# Altium PCB SimpleNode37.PcbDoc
Units mil, origin at the board's own origin, x right, y up, seen from the top; angles counter-clockwise.
Board outline 1299.21 x 551.59 mil, 2 copper layers (Top Layer, Bottom Layer); 43 components, 43 nets, 179 pads, 35 vias.
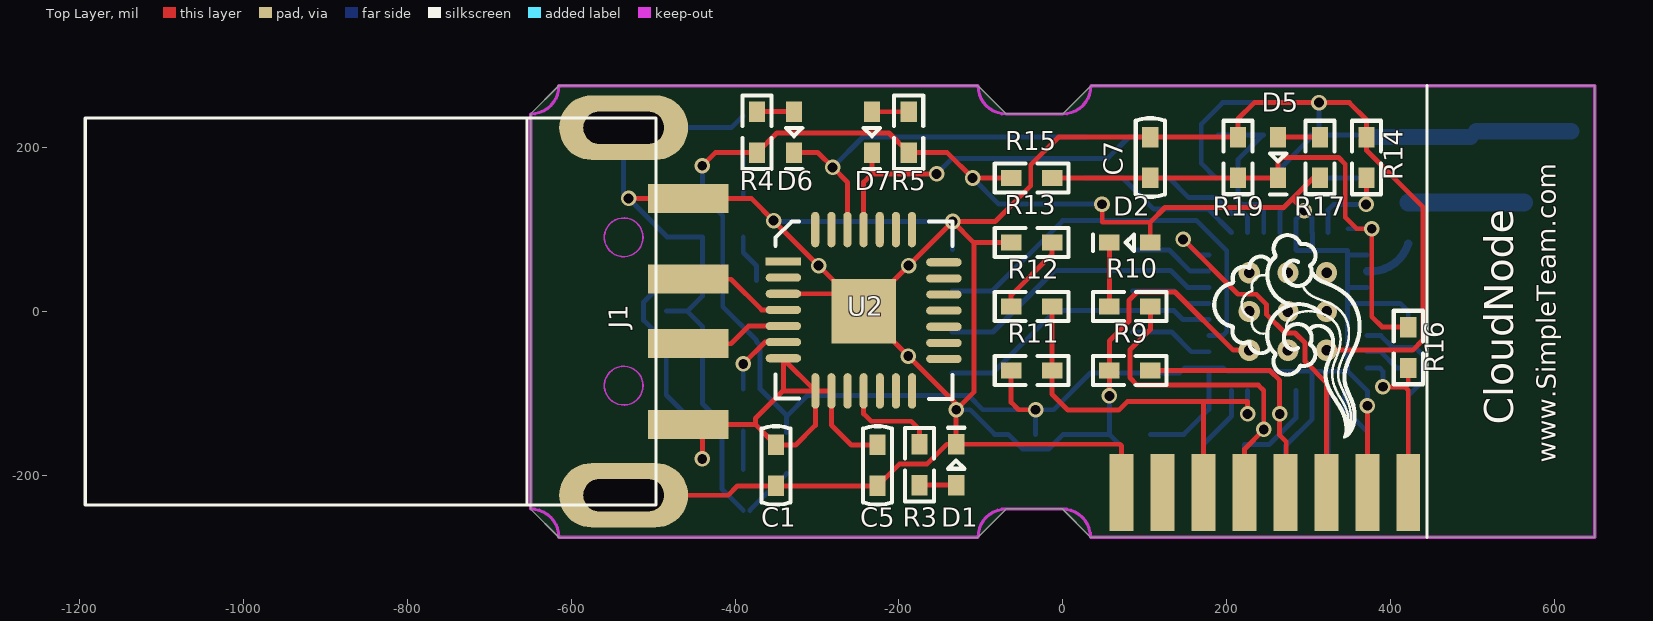
[diagram p0: Top Layer view]
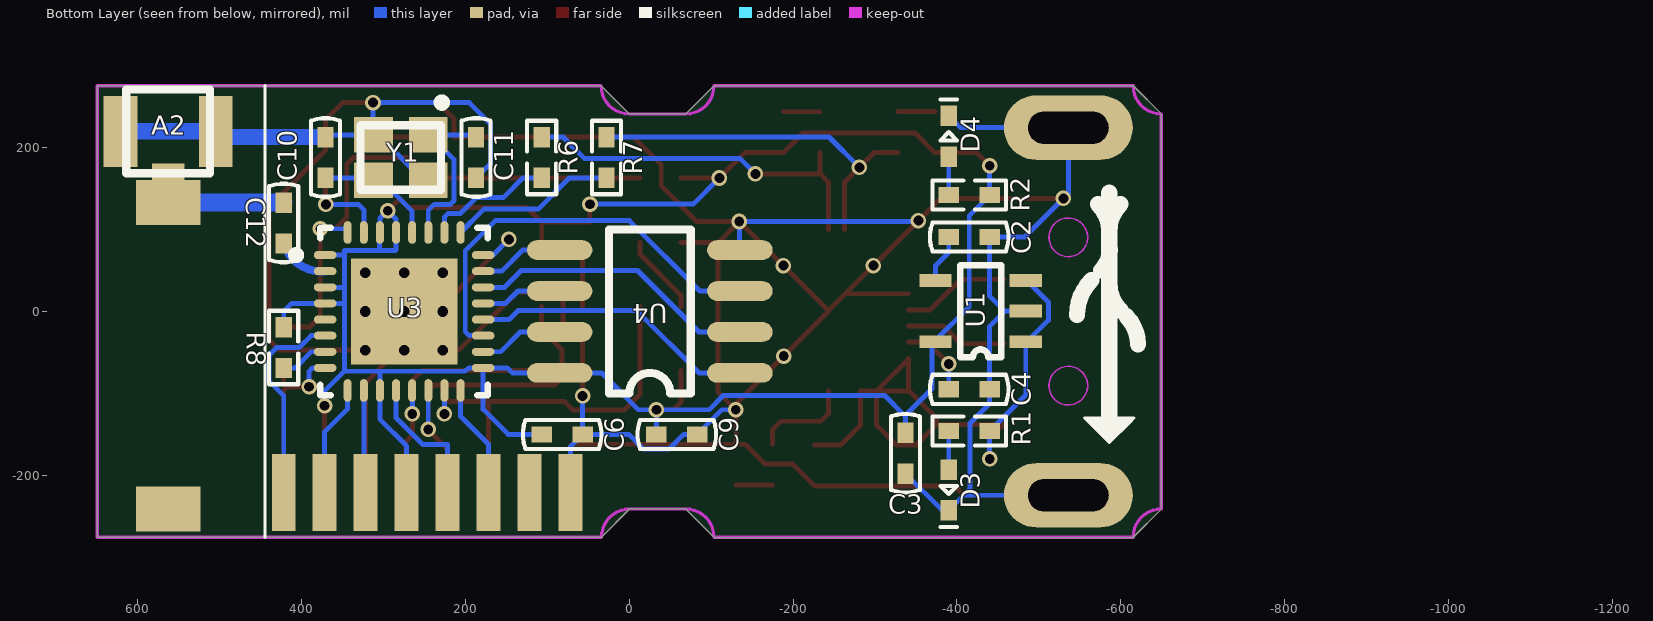
[diagram p1: Bottom Layer view, seen from below]

## Layer stack, top to bottom
Top Layer: signal copper 1.4
Dielectric: dielectric 12.6, FR-4, Dk 4.8
Bottom Layer: signal copper 1.4

## Board outline
649.61,275.59 34.45,275.59 0,241.14 -68.9,241.14 -103.35,275.59 -615.16,275.59 -649.61,241.14 -649.61,-241.14 -615.16,-275.59 -614.75,-276 -106.61,-276 -103.76,-276 -68.9,-241.14 0,-241.14 0,-241.59 34,-275.59 649.61,-275.59

## Design rules (kind name [scope] priority, off if disabled: settings)
Clearance [All] p1: gap=5
DiffPairsRouting [All] p1: maxlimit=10 minlimit=10 mostfreqgap=10 maxuncoupledlength=500
MinimumSolderMaskSliver [All] p1 off: minsoldermaskwidth=5
PolygonConnect [All] p1: connectstyle=Relief reliefconductorwidth=10 reliefentries=4 polygonreliefangle="90 Angle"
RoutingVias [All] p1: holewidth=12 width=19 viastyle="Through Hole" minholewidth=12 minwidth=19 maxholewidth=28 maxwidth=50
SilkToSilkClearance [All] p1 off: silktosilkclearance=5
SilkscreenOverComponentPads [All] p1 off: minsilkscreentomaskgap=5
SolderMaskExpansion [All] p1: expansion=4
Width Width_50ohms [InNet('NetA1_1')] p1: maxlimit=50 minlimit=10 preferedwidth=10 impedancedriven=TRUE minimp=10.000000 maximp=100.000000 favimp=50.000000
Width [All] p2: maxlimit=20 minlimit=6 preferedwidth=6
24 further rules are at their usual default settings.

## Classes and differential pairs
differential pair UD: +UD_P -UD_N

## Components (designator, comment, footprint, x,y, rotation, side; value= is the part's Value field where it differs from the comment)
A2 "50ohm" "IPEX-1 底座" 563,220 r270 bottom
C1 "105" C0402 -350,-188 r90 top
C2 "CAP" C0402 -415,91 r0 bottom
C3 "CAP" C0402 -337,-173 r90 bottom
C4 "10V" C0402 -415,-95 r0 bottom
C5 "10V" C0402 -226,-188 r270 top
C6 "10V" C0402 82,-150.01 r0 bottom
C7 "10V" C0402 107,188 r270 top
C9 "10V" C0402 -58,-150.01 r0 bottom
C10 "10V" C0402 371,188 r90 bottom locked
C11 "10V" C0402 187,188 r270 bottom locked
C12 "10V" C0402 422,108 r270 bottom
D1 "STA" LED0402 -130,-187 r90 top
D2 "STA" LED0402 82.01,84.02 r180 top
D3 "PW5V" LED0402 -390,-218 r270 bottom
D4 "PW3V3" LED0402 -390,214 r90 bottom
D5 "STA" LED0402 263,188 r270 top
D6 "TXD" LED0402 -328,219 r270 top
D7 "RXD" LED0402 -233,219 r270 top
J1 "USB-A" "USB 2.0 Type A 公头 沉板" -536,0 r0 top
R1 "5%" R0402 -415,-146 r0 bottom
R2 "5%" R0402 -415,142 r180 bottom
R3 "5%" R0402 -175,-187 r270 top
R4 "5%" R0402 -373,219 r270 top
R5 "5%" R0402 -188,219 r90 top
R6 "5%" R0402 107,188 r90 bottom
R7 "5%" R0402 28,188 r270 bottom
R8 "5%" R0402 422,-44 r270 bottom
R9 "5%" R0402 82,-72 r0 top
R10 "5%" R0402 82.01,5.98 r0 top
R11 "5%" R0402 -38,-72 r180 top
R12 "5%" R0402 -38,6 r180 top
R13 "FLASH" R0402 -38,84 r0 top
R14 "1%" R0402 371,188 r90 top
R15 "5%" R0402 -38,163 r180 top
R16 "5%" R0402 422,-44 r270 top
R17 "5%" R0402 314,188 r90 top
R19 "RESET" R0402 214,188 r270 top
U1 "SPX3819M5-L-3-3" SOT25-5 -429,3 r0 bottom
U2 "CP2102" MLP28 -243,0 r0 top locked
U3 "ESP8266" QFN32L 275,0 r180 bottom
U4 "2M Flash" SOP8 -25,0 r0 bottom
Y1 "10ppm" XTAL-2520 279,188 r0 bottom locked

## Footprints (in the part's own frame and the unit in brackets; to place one, negate y for a bottom-side part, rotate by r counter-clockwise, add the part's x,y. Pads: shape width x height; smd on the part's side, far side on the other; paste and mask are expansions set on the pad)
C0402 [mm]
  rect 0.635x0.5 smd: 1(-0.635,0) 2(0.635,0)
  silkscreen extent -1.22,-0.45 1.22,0.45
"IPEX-1 底座" [mm]
  rect 1.05x1 smd: 1(1.525,0)
  rect 2.2x1.05 smd: 2(0,1.475) 3(0,-1.475)
  silkscreen extent -1.3,-1.3 1.3,1.3
LED0402 [mm]
  rect 0.635x0.5 smd: 1(-0.632,0) 2(0.633,0)
  silkscreen extent -0.13,-0.25 1.14,0.25
MLP28 [mm]
  rect 1.1x0.25 smd: 1(-2.489,1.549)
  oval 1.1x0.25 smd: 2(-2.489,1.049) 3(-2.489,0.549) 4(-2.489,0.049) 5(-2.489,-0.451) 6(-2.489,-0.951) 7(-2.489,-1.451) 15(2.489,-1.473) 16(2.489,-0.973) 17(2.489,-0.473) 18(2.489,0.027) 19(2.489,0.527) 20(2.489,1.027) 21(2.489,1.527)
  rect 2x2 smd: 3(0,0)
  oval 0.25x1.1 smd: 8(-1.499,-2.464) 9(-0.999,-2.464) 10(-0.499,-2.464) 11(0.001,-2.464) 12(0.501,-2.464) 13(1.001,-2.464) 14(1.501,-2.464) 22(1.499,2.54) 23(0.999,2.54) 24(0.499,2.54) 25(-0.001,2.54) 26(-0.501,2.54) 27(-1.001,2.54) 28(-1.501,2.54)
  silkscreen extent -2.74,-2.71 2.76,2.79
QFN32L [mm]
  oval 0.7x0.25 smd: 1(-2.45,1.75) 2(-2.45,1.25) 3(-2.45,0.75) 4(-2.45,0.25) 5(-2.45,-0.25) 6(-2.45,-0.75) 7(-2.45,-1.25) 8(-2.45,-1.75) 17(2.45,-1.75) 18(2.45,-1.25) 19(2.45,-0.75) 20(2.45,-0.25) 21(2.45,0.25) 22(2.45,0.75) 23(2.45,1.25) 24(2.45,1.75)
  oval 0.25x0.7 smd: 9(-1.75,-2.45) 10(-1.25,-2.45) 11(-0.75,-2.45) 12(-0.25,-2.45) 13(0.25,-2.45) 14(0.75,-2.45) 15(1.25,-2.45) 16(1.75,-2.45) 25(1.75,2.45) 26(1.25,2.45) 27(0.75,2.45) 28(0.25,2.45) 29(-0.25,2.45) 30(-0.75,2.45) 31(-1.25,2.45) 32(-1.75,2.45)
  rect 3.3x3.3 smd: 33(0,0)
  silkscreen extent -3.48,-2.6 2.6,2.6, body extent -2.58,-2.58 2.58,2.58, height 0.8
R0402 [mm]
  rect 0.635x0.5 smd: 1(-0.635,0) 2(0.635,0)
  silkscreen extent -1.14,-0.45 1.14,0.45
SOP8 [mil]
  oval 80x24 smd: 1(-110,75) 2(-110,25) 3(-110,-25) 4(-110,-75) 5(110,-75) 6(110,-25) 7(110,25) 8(110,75)
  silkscreen extent -50,-100 50,100, body extent -125,-98 125,99, height 74
SOT25-5 [mm]
  rect 1x0.4 smd: 1(-1.397,1.016) 2(-1.397,0.066) 3(-1.397,-0.884) 4(1.403,-0.884) 5(1.403,1.016)
  silkscreen extent -0.64,-1.36 0.64,1.49
"USB 2.0 Type A 公头 沉板" [mm]
  oval 1.5x1.4 on Bottom Overlay: 1(-1.27,3.683)
  rect 2.5x0.9 smd: 1(2,-3.5) 2(2,-1) 3(2,1) 4(2,3.5)
  oval 4x2 hole 1 slot 2.5 at 0 deg: 4(0,-5.7) 4(0,5.7)
  Keep-Out Layer circle w0.05: c0,-2.3 r0.6
  Keep-Out Layer circle w0.05: c0,2.3 r0.6
  silkscreen extent -16.7,-6 1,6
XTAL-2520 [mm]
  rect 1.2x1.1 smd: 1(-0.85,-0.7) 2(0.85,-0.7) 3(0.85,0.7) 4(-0.85,0.7)
  silkscreen extent -1.4,-1.83 1.25,1

## Free pads (board coordinates)
  rect 78.74x55.12 smd far side: 0(563,-241.06) 0(563,133)
  rect 29.13x94.49 smd: 1(422,-220.98) 2(372.01,-220.98) 3(322.01,-220.98) 4(272.01,-220.98) 5(222.01,-220.98) 6(172.01,-220.98) 7(122.01,-220.98) 8(72.01,-221)
  rect 29.13x94.49 smd far side: 9(422,-220.98) 10(372.01,-220.98) 11(322.01,-220.98) 12(272.01,-220.98) 13(222.01,-220.98) 14(172.01,-220.98) 15(122.01,-220.98) 16(72.01,-221)

## Via types
v1: diameter 19, hole 12, Top Layer to Bottom Layer, 26 vias
v2: diameter 25.98, hole 12.99, Top Layer to Bottom Layer, tented top, 9 vias

## Nets (pads, with @x,y where several pads share a name; then routed paths per layer and width w, separated by ;. In a path a pad name is that pad's centre, name@x,y a point inside that pad or via, vN(x,y) a via of type N, cw(c..) or ccw(c..) an arc to the next point about the centre after c; other vN are vias at no path point)
ADC: pad.9 U3.6 | length 253.4
  Bottom Layer w6: U3.6 388.53,-29.53 403,-44 430.66,-44 439.84,-53.19 439.84,-85.16 422,-103 pad.9
GND: A2.2 A2.3 C1.1 C2.1 C3.1 C4.1 C5.2 C6.1 C7.1 C9.1 C10.2 C11.2 D1.2 D3.2 D4.2 J1.4 pad.8 pad.16 R9.1 R13.1 R14.2 R19.1 U1.2 U2.3 U3.33 U4.4 Y1.2 Y1.4 | length 5336.9
  Top Layer w6: J1.4@-536,-224.41 -408.49,-224.41 -397.08,-213 C1.1 C5.2 -199,-186 -165.34,-186 -141.44,-162.1 D1.2 ; v1@-529.8,137.8 -457.26,137.8 -379.8,137.8 v1(-353,111) -243,1 -243,1.15 v1(-134.31,109.84) ; U2.3@-341,21.63 U2.3@-264.63,21.63 ; U2.3@-243,0 -130,-113 v1(-130,-120) ; R13.1 -108.47,84 ; v1(57,-103) R9.1 57,-36 81,-12 81,13.63 91.19,23.83 137.17,23.83 208.24,-47.24 v2(227.76,-47.24) ; pad.8 72.01,-164.01 70.1,-162.1 D1.2 ; v2(322.24,-47.24) 427.41,-47.24 439.84,-34.81 439.84,127.81 371,196.66 R14.2 371,234 350,255 v1(313,255) 234,255 214,235 R19.1 C7.1 -5,213 -39,179 -39,153.34 -82.5,109.84 v1(-134.31,109.84) ; v1(-134.31,109.84) -108.47,84 ; D1.2 v1(-130,-120) ; v1(-130,-120) -108.47,-98.47 -108.47,84
  Bottom Layer w6: J1.4@-536,-224.41 -408.49,-224.41 ; U1.2 -458.4,0.4 ; J1.4@-480,199 J1.4@-536,224.41 ; D3.2 -408.49,-224.41 ; D4.2 -404.49,224.41 J1.4@-536,224.41 ; D3.2@-381.9,-242.9 C3.1 ; v1@-351.84,109.84 v1(-134.31,109.84) U4.4@-134.31,75.69 ; v1(-130,-120) -113.01,-120 C9.1 -66.66,-150.01 -48.81,-167.85 -17.19,-167.85 0.66,-150.01 C6.1 ; v1(57,-103) C6.1 ; pad.16 72.01,-165.02 C6.1 ; C11.2 169.16,180.84 169.16,228.81 195.34,255 v1(313,255) Y1.2@313,216.09 ; Y1.4@255.88,160.44 Y1.4@255.88,168.88 ; Y1.4@256.88,165.88 Y1.2@303.56,212.56 ; Y1.2@302.56,215.56 Y1.2 C10.2@368.44,215.56 ; J1.4@-536,224.41 -536,144 v1(-530,138) -483,91 C2.1 -440,18.8 -458.4,0.4 ; -458.4,0.4 -440,-18 C4.1 -440,-112.34 -416,-136.34 -416,-216.9 -408.49,-224.41
  Bottom Layer w20: C10.2 A2.2@497.93,213 ; A2.2 A2.3
  other v1: -188.5,-54.5 -298,56 -188.15,56
  other v2: 275,-47.24 227.76,0 275,0 322.24,0 227.76,47.24 275,47.24 322.24,47.24
GPIO0: pad.6 R11.1 R12.1 U3.15 | length 510.7
  Top Layer w6: R12.1 R11.1 -13,-101 6.5,-120.5 68.5,-120.5 79,-110 225.79,-110 v1(225.79,-125) ; pad.6 172.01,-112.01
  Bottom Layer w6: v1(225.79,-125) U3.15
GPIO2: pad.5 R10.2 U3.14 | length 443.8
  Top Layer w6: R10.2 107.01,-21.99 82,-47 82,-80.66 91.19,-89.84 238.86,-89.84 245.47,-96.46 245.47,-144.53 222.01,-167.99 pad.5
  Bottom Layer w6: v1@245.47,-139 U3.14
  other v1: 245.47,-144
GPIO4: pad.14 U3.16 | length 138.7
  Bottom Layer w6: pad.14 172.01,-161.99 206.1,-127.9 U3.16
GPIO5: pad.3 U3.24 | length 441.2
  Top Layer w6: v1(147,88) 214.01,20.99 236.45,20.99 248.75,8.7 248.75,-3.44 271.56,-26.25 283.7,-26.25 295.99,-38.55 295.99,-60.99 322.01,-87.01 pad.3
  Bottom Layer w6: v1(147,88) 166.1,68.9 U3.24
GPIO12: pad.11 U3.10 | length 122.3
  Bottom Layer w6: pad.11@324.21,-218.78 U3.10
GPIO13: pad.13 U3.12 | length 168.3
  Bottom Layer w6: pad.13 222.01,-162.46 252.28,-162.46 284.84,-129.91 U3.12
GPIO14: pad.10 U3.9 | length 136.2
  Bottom Layer w6: U3.9 343.9,-118.9 372.01,-147.01 pad.10
GPIO15: pad.4 R9.2 U3.13 | length 330.7
  Top Layer w6: R9.2 253,-72 265,-84 v1(265,-125) 265,-151 273,-159 pad.4@273,-219.99
  Bottom Layer w6: v1(265,-125) U3.13@265,-96.61
GPIO16: pad.1 R16.2 U3.8 | length 222.5
  Top Layer w6: v1(391,-92) 418,-92 ; pad.1 422,-96 418,-92 ; R16.2 422,-88 418,-92
  Bottom Layer w6: U3.8 386.9,-68.9 391,-73 v1(391,-92)
NetA1_1: A2.1 C12.1 pad.0@563,133 | length 141
  Bottom Layer w22: C12.1 pad.0@563,133
NetC2_2: C2.2 U1.4 | length 59.9
  Bottom Layer w6: C2.2 -390,72 -373.76,55.76 U1.4
NetC4_2: C4.2 U2.6 | length 91
  Top Layer w6: v1(-390,-64) -363.43,-37.43 U2.6
  Bottom Layer w6: C4.2 v1(-390,-64)
NetC7_2: C7.2 D5.2 R15.1 R16.1 R19.2 U3.32 | length 672.5
  Top Layer w6: R15.1 C7.2 R19.2 ; R19.2@214.1,163.1 D5.2 263,183 268,188 337,188 345,180 345,115 359,101 v1(377.36,101) 377.36,-6.36 390,-19 R16.1
  Bottom Layer w6: U3.32@348.44,101 v1(377.36,101)
NetC10_1: C10.1 U3.28 Y1.3 | length 144.8
  Bottom Layer w6: U3.28 265.16,122.16 303.44,160.44 Y1.3 ; Y1.3@315.02,163 C10.1
NetC11_1: C11.1 U3.27 Y1.1 | length 212.1
  Bottom Layer w6: C11.1@189.56,215.56 Y1.1@244.06,215.56 ; U3.27 245.47,123.53 238.21,130.79 218.6,130.79 213.91,135.47 213.91,185.41 Y1.1@244.06,215.56 ; Y1.1 Y1.1@244.06,215.56
NetC12_2: C12.2 U3.2 | length 65.8
  Bottom Layer w10: U3.2 ccw(c376,97.11) C12.2
NetD1_1: D1.1 R3.2 | length 44.9
  Top Layer w6: R3.2 D1.1@-130.1,-212
NetD2_2: D2.2 R10.1 | length 78.1
  Top Layer w6: R10.1 57.11,6.08 D2.2
NetD3_1: D3.1 R1.2 | length 47.1
  Bottom Layer w6: D3.1 R1.2
NetD4_1: D4.1 R2.1 | length 47.1
  Bottom Layer w6: R2.1 D4.1
NetD5_1: D5.1 R17.2 | length 50.9
  Top Layer w6: D5.1@263.1,213 R17.2
NetD6_1: D6.1 R4.1 | length 44.9
  Top Layer w6: R4.1 D6.1@-328.1,244
NetD7_1: D7.1 R5.2 | length 44.9
  Top Layer w6: D7.1 R5.2@-188.1,243.9
NetR3_1: R3.1 U2.11 | length 121.8
  Top Layer w6: U2.11 -242.95,-124.95 -233.89,-134 -185,-134 -175,-144 R3.1
NetR8_2: R8.2 U3.7 | length 58.7
  Bottom Layer w6: U3.7 388.21,-49.21 408,-69 R8.2
NetR12_2: R12.2 R13.2 | length 98.7
  Top Layer w6: R12.2 -63,20 -13,70 R13.2
NetR14_1: R14.1 U3.31 | length 108.9
  Top Layer w6: v1@371,130.79 R14.1
  Bottom Layer w6: U3.31 324.21,124.21 330.79,130.79 v1(370.44,130.79)
RXD: D7.2 R6.2 U2.25 | length 456.9
  Top Layer w6: U2.25 -243.05,157.95 -233,168 ; D7.2 -233,168 ; v1(-154,168) -233,168
  Bottom Layer w6: v1(-154,168) -135,187 55,187 81,213 R6.2
SD_CLK: U3.21 U4.6 | length 99.8
  Bottom Layer w6: U4.6 136,25 151.16,9.84 U3.21
SD_CMD: U3.20 U4.1 | length 349.5
  Bottom Layer w6: U4.1 -85,-75 -9,1 136,1 146.84,-9.84 U3.20
SD_DATA_0: U3.22 U4.2 | length 353.1
  Bottom Layer w6: U4.2 -85,-25 -10,50 132,50 152.47,29.53 U3.22
SD_DATA_1: U3.23 U4.5 | length 104.2
  Bottom Layer w6: U4.5 130,75 155.79,49.21 U3.23
SD_DATA_2: U3.18 U4.7 | length 103.6
  Bottom Layer w6: U4.7 133,-25 157.21,-49.21 U3.18
SD_DATA_3: U3.19 U4.3 | length 508.9
  Bottom Layer w6: U4.3 -86,25 0,111 163.57,111 200.32,74.25 200.32,-24.68 195.47,-29.53 U3.19
TXD: D6.2 R7.1 U2.26 | length 462.3
  Top Layer w6: D6.2 -299.1,194.1 v1(-280.92,175.92) -262.74,157.74 U2.26
  Bottom Layer w6: v1(-280.92,175.92) -243.84,213 R7.1
U0RXD: R7.2 U3.25 | length 205.7
  Bottom Layer w6: R7.2 73.34,163 111.34,125 177.56,125 U3.25
U0TXD: R6.1 U3.26 | length 157.3
  Bottom Layer w6: R6.1 130,163 154,139 187,139 206.21,119.79 221.21,119.79 225.79,115.21 U3.26
UD_N: J1.2 U2.5 | length 125.2
  Top Layer w6: J1.2 -405,-39.37 -383.37,-17.74 U2.5
UD_P: J1.3 U2.4 | length 131.8
  Top Layer w6: J1.3 -405,39.37 -367.57,1.94 U2.4
VCC3V3: C3.2 C6.2 C9.2 D2.1 pad.2 pad.12 R2.2 R4.2 R5.1 R8.1 R11.2 R15.2 R17.1 U1.5 U3.1 U3.3 U3.4 U3.11 U3.17 U3.29 U3.30 U4.8 | length 3065.4
  Top Layer w6: v1(-440,178) -424,194 R4.2 -349,218 -212,218 R5.1 -141,194 v1(-110,163) R15.2 ; R11.2 -63,-111 -54,-120 v1(-33,-120) ; v1@48.34,130.66 48.34,108.91 106.91,108.91 ; D2.1 106.91,108.91 ; 281,137 v1(295,123) ; R17.1 306,163 270,127 125,127 106.91,108.91 ; pad.2 v1(372,-115)
  Bottom Layer w6: v1(-440,178) R2.2 -415,117 -415,6 U1.5@-373.76,-35.24 ; U1.5 -369.5,-41.26 -369.5,-94.5 -337,-127 C3.2 -337,-128 -311.5,-102.5 -114.95,-102.5 -97.45,-120 v1(-33,-120) ; v1(-110,163) -78,131 v1(48,131) ; C9.2 v1(-33,-120) ; C6.2 147.99,-150.01 178.54,-119.46 U3.17 196.1,-68.9 200.96,-72.96 347.96,-72.96 ; U3.17@177.65,-68.9 149.1,-68.9 143,-75 U4.8 34,-75 -11,-120 v1(-33,-120) ; pad.12 272.01,-163.99 304.53,-131.47 U3.11 304.53,-73.49 ; U3.30 304.53,113.47 v1(295,123) 284.84,112.84 U3.29 284.84,75.16 285.32,74.68 305,74.68 ; U3.30@305,95.98 305,74.68 ; 348.43,29.53 U3.3 ; 348.8,9.84 U3.4 412.16,9.84 422,0 R8.1 ; 350,69 U3.1@371.35,69 ; v1(372,-115) 372.01,-97.01 347.96,-72.96 ; 305,74.68 347.96,74.68 347.96,-72.96
VCC5V: C1.2 C5.1 J1.1@-457.26,-137.8 R1.1 U1.1 U1.3 U2.7 U2.8 U2.9 | length 842
  Top Layer w6: v1(-440,-180) -440,-155.06 -457.26,-137.8 -375.2,-137.8 ; U2.7 U2.7@-341,-58 ; -340,-97 U2.8 ; C5.1 -258,-163 -282.32,-138.68 U2.9 U2.8 ; -375.2,-137.8 C1.2 -326,-163 -302,-139 U2.8 ; -375.2,-137.8 -375.2,-130.67 -341,-96.46 U2.7@-341,-58 ; U2.7@-341,-58 U2.8
  Bottom Layer w6: U1.1@-485.47,-37 -511.69,-10.79 -511.69,11.59 -485.47,37.8 U1.3 ; U1.1 -484,-102 R1.1 v1(-440,-180)
pads on no net: J1.1@-586,145 U2.1 U2.2 U2.10 U2.12 U2.13 U2.14 U2.15 U2.16 U2.17 U2.18 U2.19 U2.20 U2.21 U2.22 U2.23 U2.24 U2.27 U2.28 U3.5

## Keep-outs
Keep-Out Layer:
  lines w3.94: -0.45,-241.14 cw(c-0.45,-275.59) 34,-275.59 ; 0,-241.14 -68.9,-241.14 ccw(c-68.9,-275.59) -103.35,-275.59 -305.12,-275.59 -615.16,-275.59 ccw(c-649.61,-275.59) -649.61,-241.14 -649.61,241.14 ccw(c-649.61,275.59) -615.16,275.59 -305.12,275.59 -103.35,275.59 ccw(c-68.9,275.59) -68.9,241.14 0,241.14 ccw(c0,275.59) 34.45,275.59 649.61,275.59 649.61,-275.59 34.45,-275.59

## Silkscreen, mask and mechanical layers (free items; w line width, h text height)
Top Overlay:
  drawing of 3470 lines, arcs and shapes, not listed
  text "CloudNode" at 562,-138 h60 r90
  text "www.SimpleTeam.com" at 610,-185 h40 r90
Bottom Overlay:
  lines w3.94: 444.88,-275.59 444.88,275.59